# Altium PCB transistor_harness.PcbDoc
Units mm, origin at the board's own origin, x right, y up, seen from the top; angles counter-clockwise.
Board outline 32.1 x 55.3 mm, 2 copper layers (Top Layer, Bottom Layer), stack 1.5 mm thick; 4 components, 4 nets, 40 pads, 49 vias.
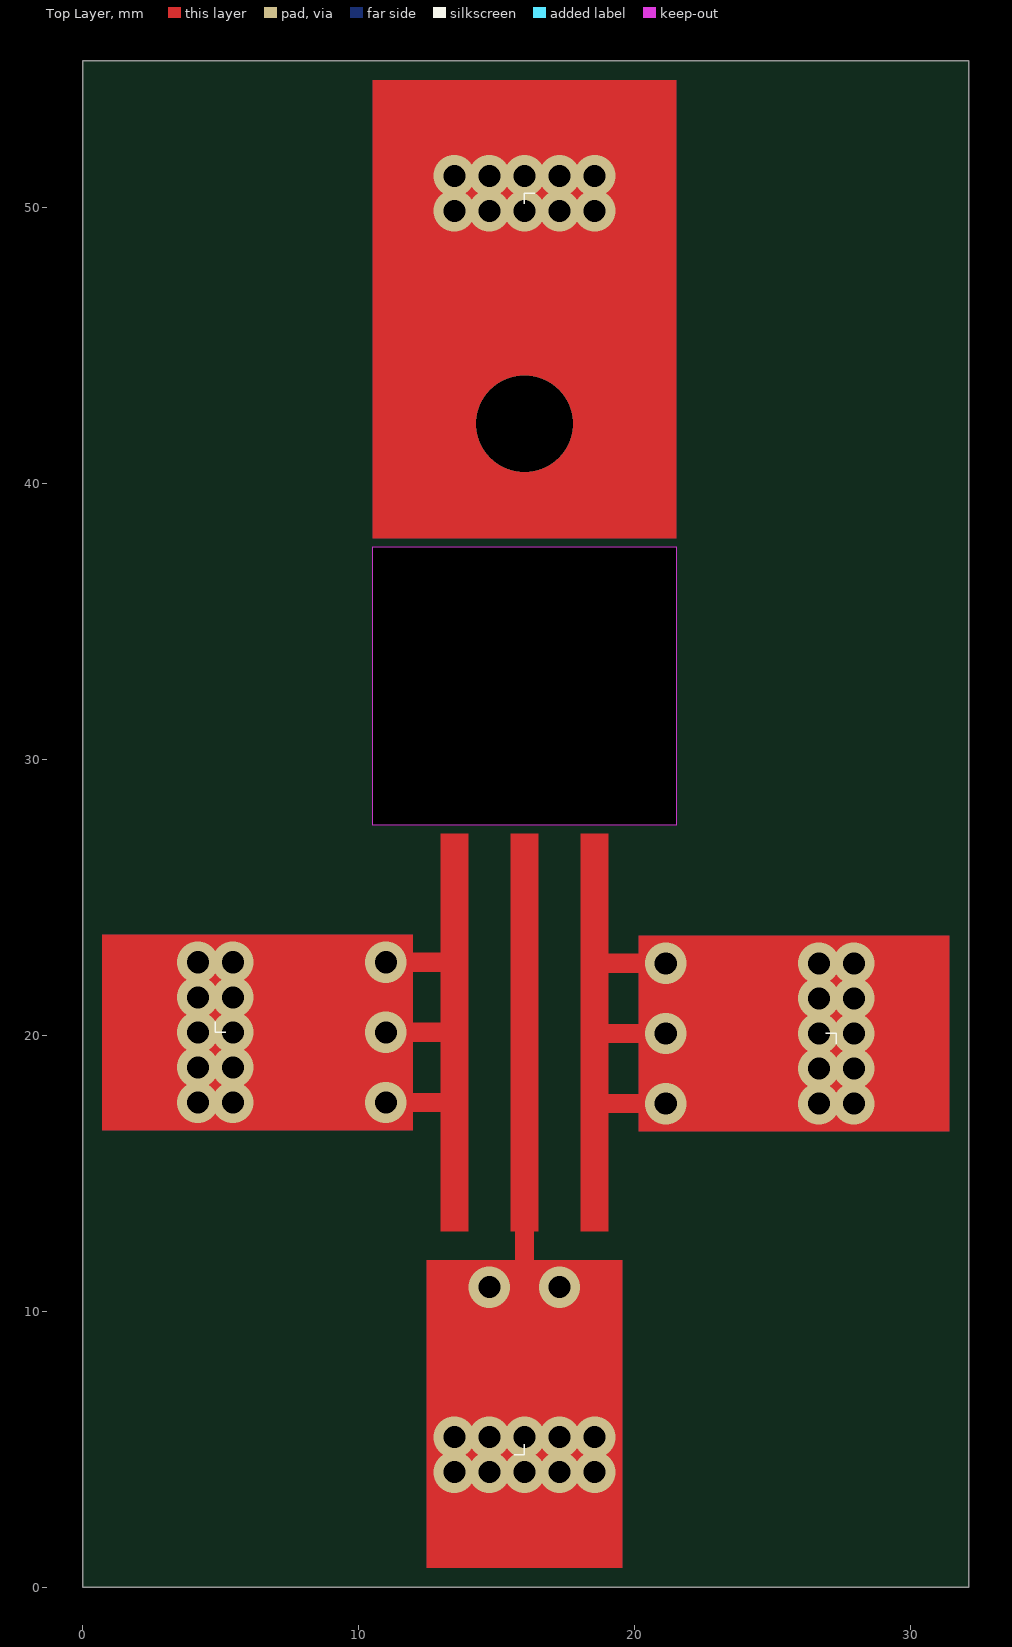
[diagram p0: Top Layer view]
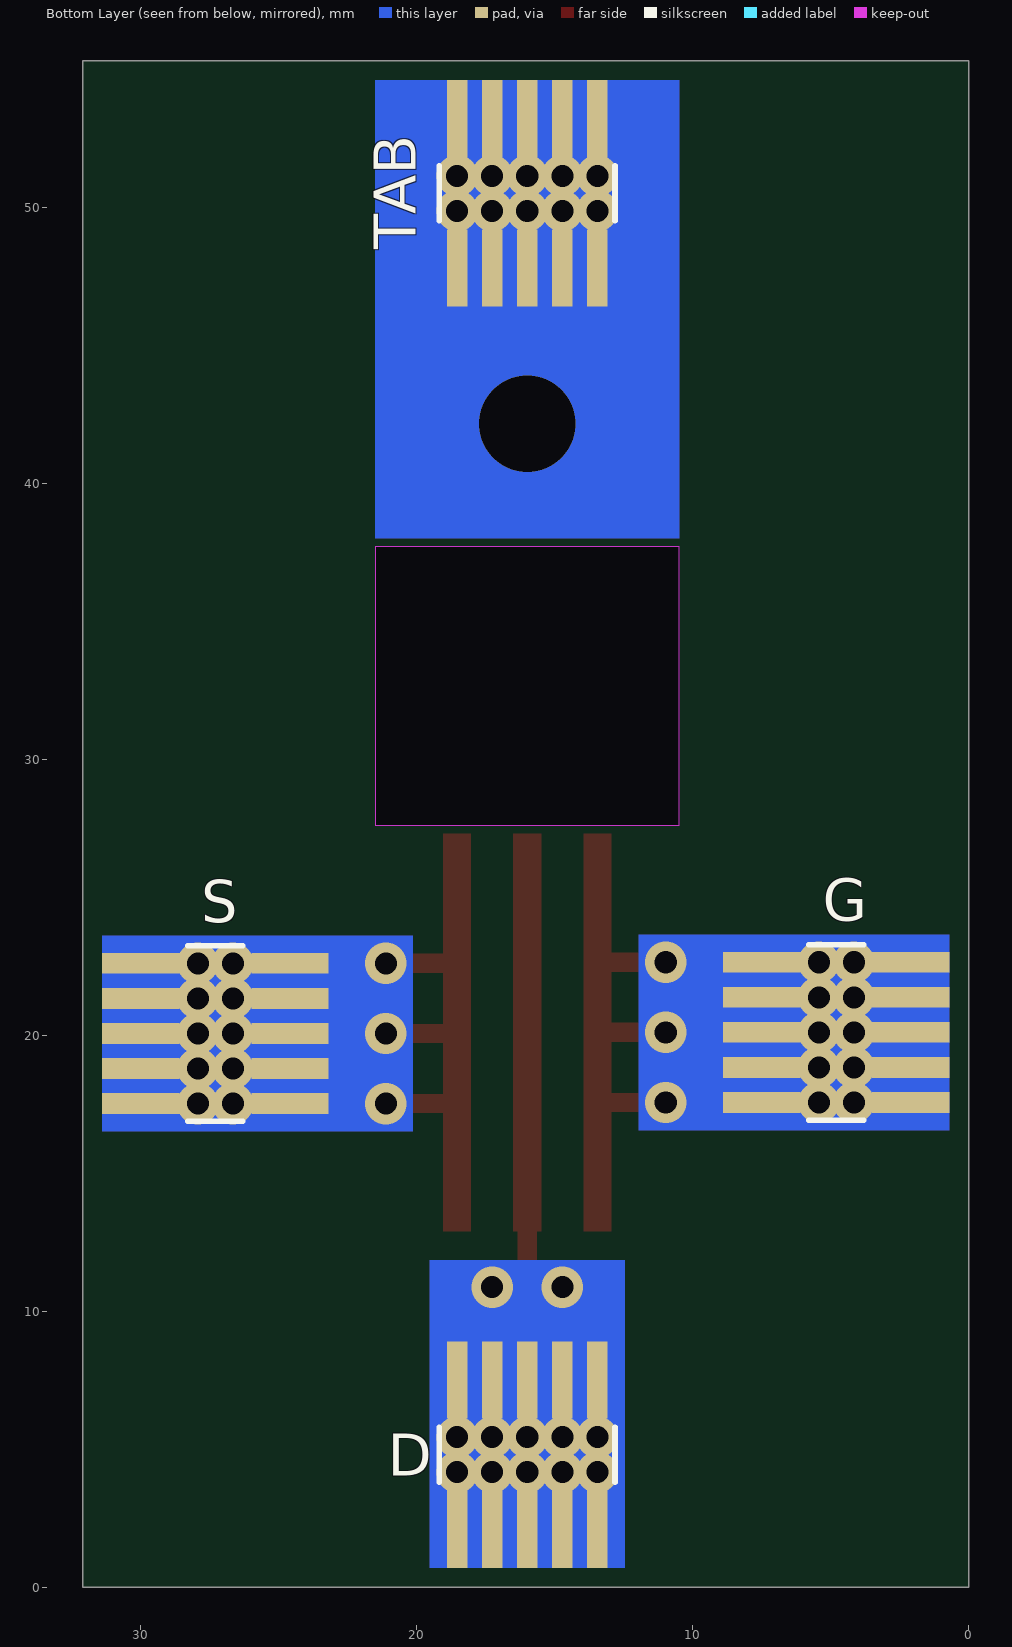
[diagram p1: Bottom Layer view, seen from below]
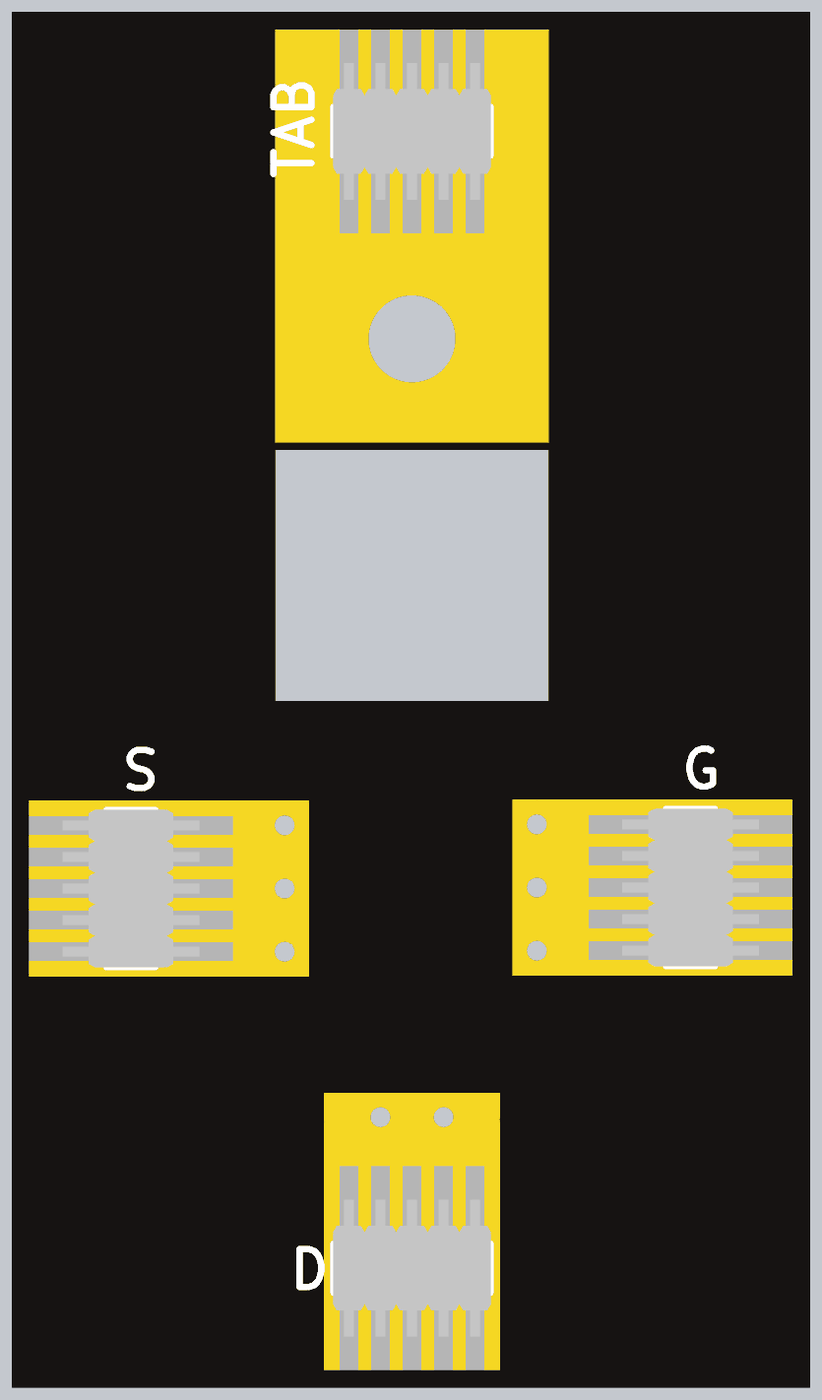
[diagram p2: 3D render of the assembled board from below, using the file's embedded part models]

## Layer stack, top to bottom
Top Solder: solder mask 0.0102, Solder Resist, Dk 3.5
Top Layer: signal copper 0.035
Dielectric 1: dielectric 1.43, FR-4, Dk 4.8
Bottom Layer: signal copper 0.035
Bottom Solder: solder mask 0.0102, Solder Resist, Dk 3.5

## Board outline
32.1,55.3 32.1,0 0,0 0,55.3
cut-out: 10.5,37.7 21.5,37.7 21.5,27.6 10.5,27.6

## Design rules (kind name [scope] priority, off if disabled: settings)
Clearance [All] p1: gap=0.254 ignorepadtopadclearanceinfootprint=FALSE except(0: Arc-Hole Track-Hole SMDPad-Hole THPad-Hole Via-Hole Fill-Hole Poly-Hole Region-Hole Text-Hole)
PolygonConnect [All] p1: connectstyle=Relief reliefconductorwidth=0.254 reliefentries=4 polygonreliefangle="90 Angle" airgapwidth=0.254
RoutingVias [All] p1: holewidth=0.5 width=0.9 viastyle="Through Hole" minholewidth=0.3 minwidth=0.6 maxholewidth=6 maxwidth=6
SolderMaskExpansion [All] p1: expansion=0.102
Width [All] p1: maxlimit=5 minlimit=0.254 preferedwidth=0.254
30 further rules are at their usual default settings.

## Components (designator, comment, footprint, x,y, rotation, side; value= is the part's Value field where it differs from the comment)
D "PLLD1.27-10S" PLLD1.27-10S 13.46,4.8 r90 bottom
G "PLLD1.27-10S" PLLD1.27-10S 4.8,17.56 r180 bottom
S "PLLD1.27-10S" PLLD1.27-10S 27.3,22.6 r0 bottom
TAB "PLLD1.27-10S" PLLD1.27-10S 13.46,50.5 r90 bottom

## Footprints (in the part's own frame and the unit in brackets; to place one, negate y for a bottom-side part, rotate by r counter-clockwise, add the part's x,y. Pads: shape width x height; smd on the part's side, far side on the other; paste and mask are expansions set on the pad)
PLLD1.27-10S [mm]
  rect 2.8x0.75 smd: 1(-2.7,5.08) 2(2.7,5.08) 3(-2.7,3.81) 4(2.7,3.81) 5(-2.7,2.54) 6(2.7,2.54) 7(-2.7,1.27) 8(2.7,1.27) 9(-2.7,0) 10(2.7,0)
  silkscreen extent -1,-0.64 1,5.72, body extent -2.75,-0.64 2.75,5.72, height 4.5

## Part data
D G S TAB: System=Connector

## Via types
v1: diameter 1.5, hole 0.8, Top Layer to Bottom Layer, 40 vias
v2: diameter 1.5, hole 0.8, Top Layer to Bottom Layer, tented both sides, 8 vias
v3: diameter 3.5, hole 3.5, Top Layer to Bottom Layer, 1 vias

## Nets (pads, with @x,y where several pads share a name; then routed paths per layer and width w, separated by ;. In a path a pad name is that pad's centre, name@x,y a point inside that pad or via, vN(x,y) a via of type N, cw(c..) or ccw(c..) an arc to the next point about the centre after c; other vN are vias at no path point)
D: D.1 D.2 D.3 D.4 D.5 D.6 D.7 D.8 D.9 D.10 | length 2.5
  Top Layer w0.7: 16,11.18 16,13.67
  other v1: 13.46,4.165 14.73,4.165 16,4.165 17.27,4.165 18.54,4.165 13.46,5.435 14.73,5.435 16,5.435 17.27,5.435 18.54,5.435
  other v2: 14.73,10.87 17.27,10.87
G: G.1 G.2 G.3 G.4 G.5 G.6 G.7 G.8 G.9 G.10 | length 7.1
  Top Layer w0.7: v2(10.98,17.56) 13.36,17.56 ; v2(10.98,20.1) 13.36,20.1 ; v2(10.98,22.64) 13.36,22.64
  other v1: 4.165,17.56 5.435,17.56 4.165,18.83 5.435,18.83 4.165,20.1 5.435,20.1 4.165,21.37 5.435,21.37 4.165,22.64 5.435,22.64
S: S.1 S.2 S.3 S.4 S.5 S.6 S.7 S.8 S.9 S.10 | length 7.1
  Top Layer w0.7: 18.74,17.52 v2(21.12,17.52) ; 18.74,20.06 v2(21.12,20.06) ; 18.74,22.6 v2(21.12,22.6)
  other v1: 26.665,17.52 27.935,17.52 26.665,18.79 27.935,18.79 26.665,20.06 27.935,20.06 26.665,21.33 27.935,21.33 26.665,22.6 27.935,22.6
TAB: TAB.1 TAB.2 TAB.3 TAB.4 TAB.5 TAB.6 TAB.7 TAB.8 TAB.9 TAB.10 | length 47.4
  Bottom Layer w0.4: 13.46,43.71 TAB.9 TAB.10 ; 14.73,43.71 TAB.7 TAB.8 ; v3@16,43.71 TAB.5 TAB.6 ; 17.27,43.71 TAB.3 TAB.4 ; 18.54,43.71 TAB.1 TAB.2
  other v1: 13.46,49.865 14.73,49.865 16,49.865 17.27,49.865 18.54,49.865 13.46,51.135 14.73,51.135 16,51.135 17.27,51.135 18.54,51.135
  other v3: 16,42.16

## Other copper
Top Layer:
  region net G: 10.98,16.56 11.96,16.56 11.96,23.64 10.98,23.64
  region net G: 10.98,16.56 0.7,16.56 0.7,23.64 10.98,23.64
  region net S: 21.12,23.6 20.14,23.6 20.14,16.52 21.12,16.52
  region net S: 21.12,23.6 31.4,23.6 31.4,16.52 21.12,16.52
  region net D: 12.46,10.87 12.46,11.85 19.54,11.85 19.54,10.87
  region net D: 12.46,10.87 12.46,0.7 19.54,0.7 19.54,10.87
  region net TAB: 10.5,38 10.5,54.6 21.5,54.6 21.5,38
  region net TAB: 10.5,37.7
  region net S: 18.04,27.3 19.04,27.3 19.04,12.9 18.04,12.9
  region net G: 12.96,27.3 13.96,27.3 13.96,12.9 12.96,12.9
  region net D: 15.5,27.3 16.5,27.3 16.5,12.9 15.5,12.9
Bottom Layer:
  region net TAB: 21.5,38 21.5,54.6 10.5,54.6 10.5,38
  region net D: 12.46,10.87 12.46,11.85 19.54,11.85 19.54,10.87
  region net D: 12.46,10.87 12.46,0.7 19.54,0.7 19.54,10.87
  region net S: 21.12,23.6 31.4,23.6 31.4,16.52 21.12,16.52
  region net S: 21.12,23.6 20.14,23.6 20.14,16.52 21.12,16.52
  region net G: 10.98,23.64 0.7,23.64 0.7,16.56 10.98,16.56
  region net G: 10.98,23.64 11.96,23.64 11.96,16.56 10.98,16.56
  region net TAB: 10.5,38 10.5,45 21.5,45 21.5,38

## Silkscreen, mask and mechanical layers (free items; w line width, h text height)
Top Overlay:
  lines w0.05: 4.8,20.476 4.8,20.1 5.176,20.1 ; 15.624,4.8 16,4.8 16,5.176 ; 16,50.124 16,50.5 16.376,50.5 ; 26.924,20.06 27.3,20.06 27.3,19.684
Top Solder:
  region: 0,55.3 0,0 32.1,0 32.1,55.3
  region: 5.466,17.596
  region: 5.435,17.56
Bottom Solder:
  region: 0,55.3 0,0 32.1,0 32.1,55.3
Board Outline:
  lines w0.2: 0,0 0,55.3 32.1,55.3 32.1,0 0,0 ; 10.5,27.6 10.5,37.7 21.5,37.7 21.5,27.6 10.5,27.6